# Altium PCB PCB_terminal_controller_2024-05-08.pcbdoc
Units mil, origin at the board's own origin, x right, y up, seen from the top; angles counter-clockwise.
Board outline 3205 x 4035 mil, 2 copper layers (Top Layer, Bottom Layer); 13 components, 17 nets, 138 pads, 19 vias.
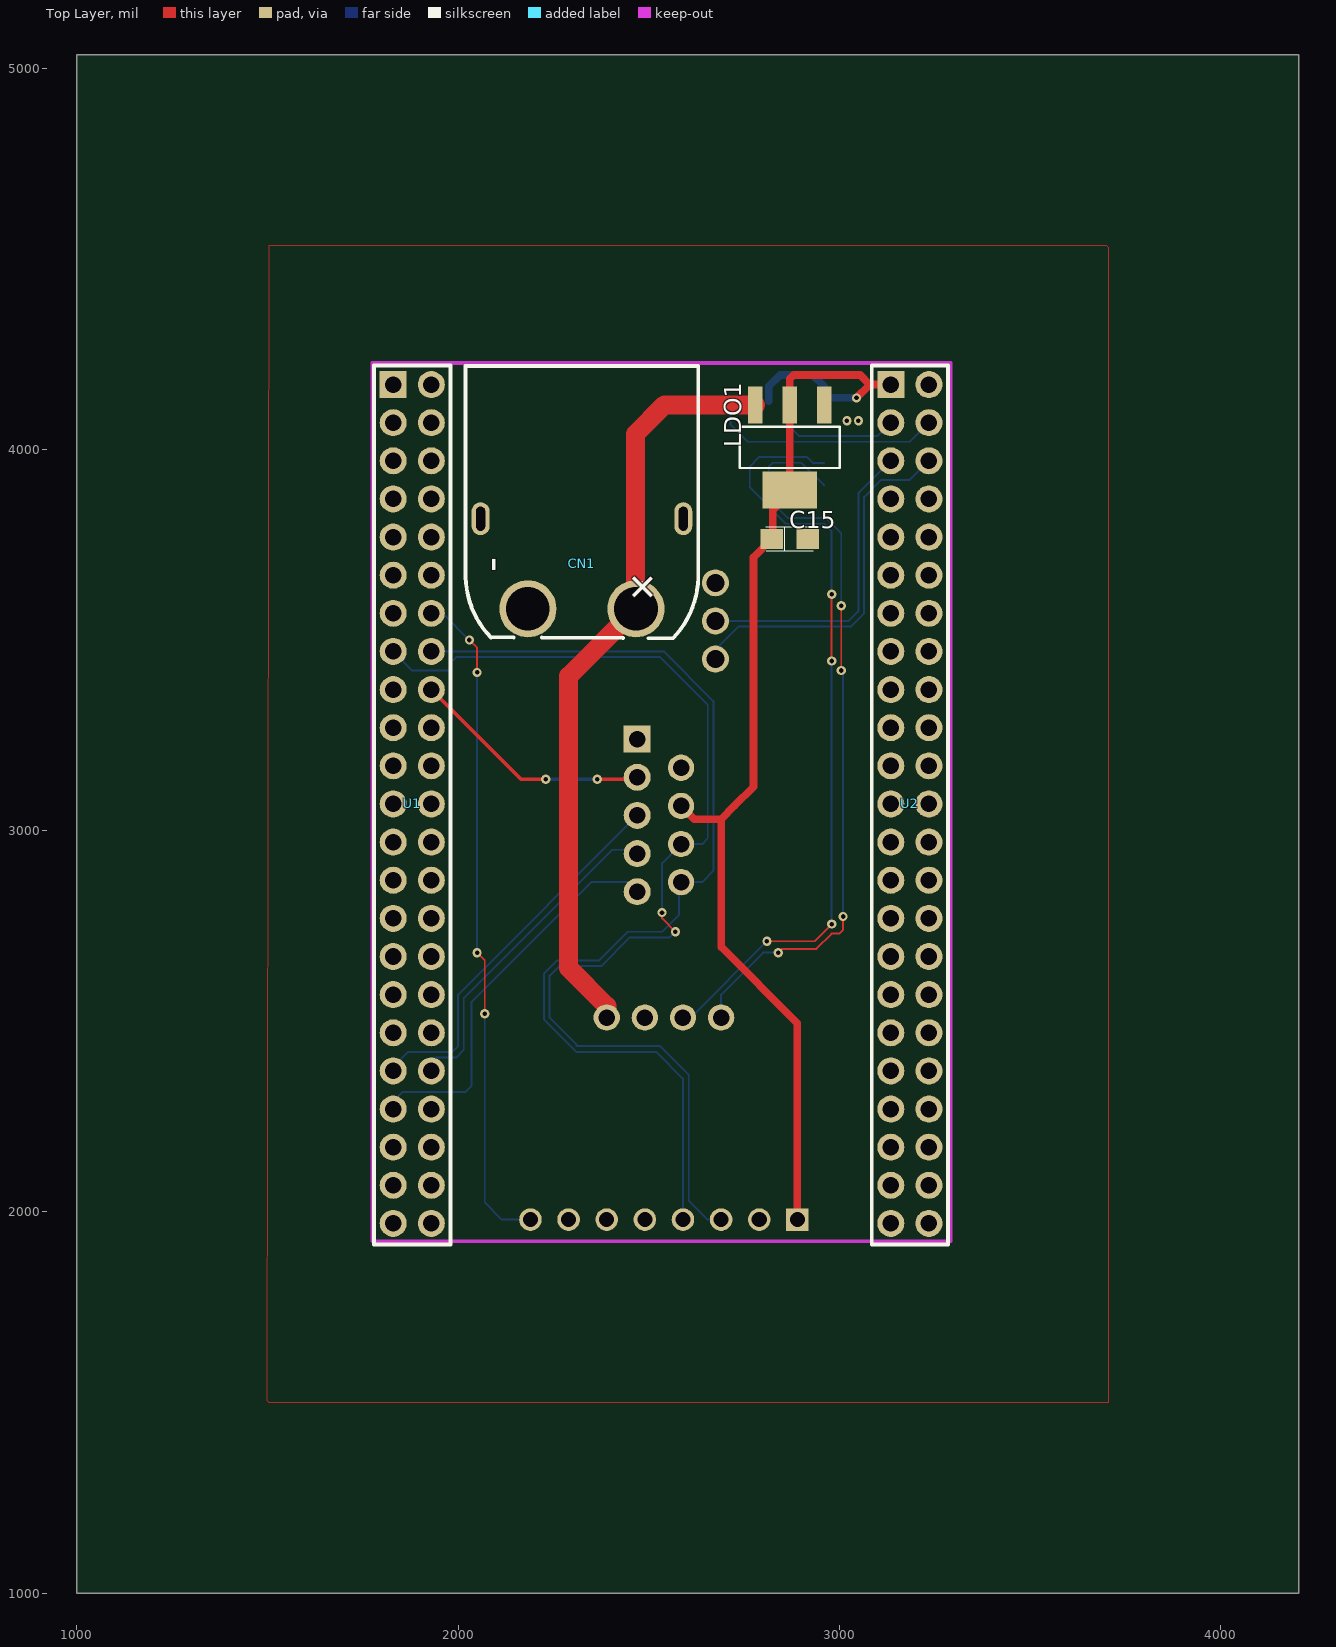
[diagram p0: Top Layer view]
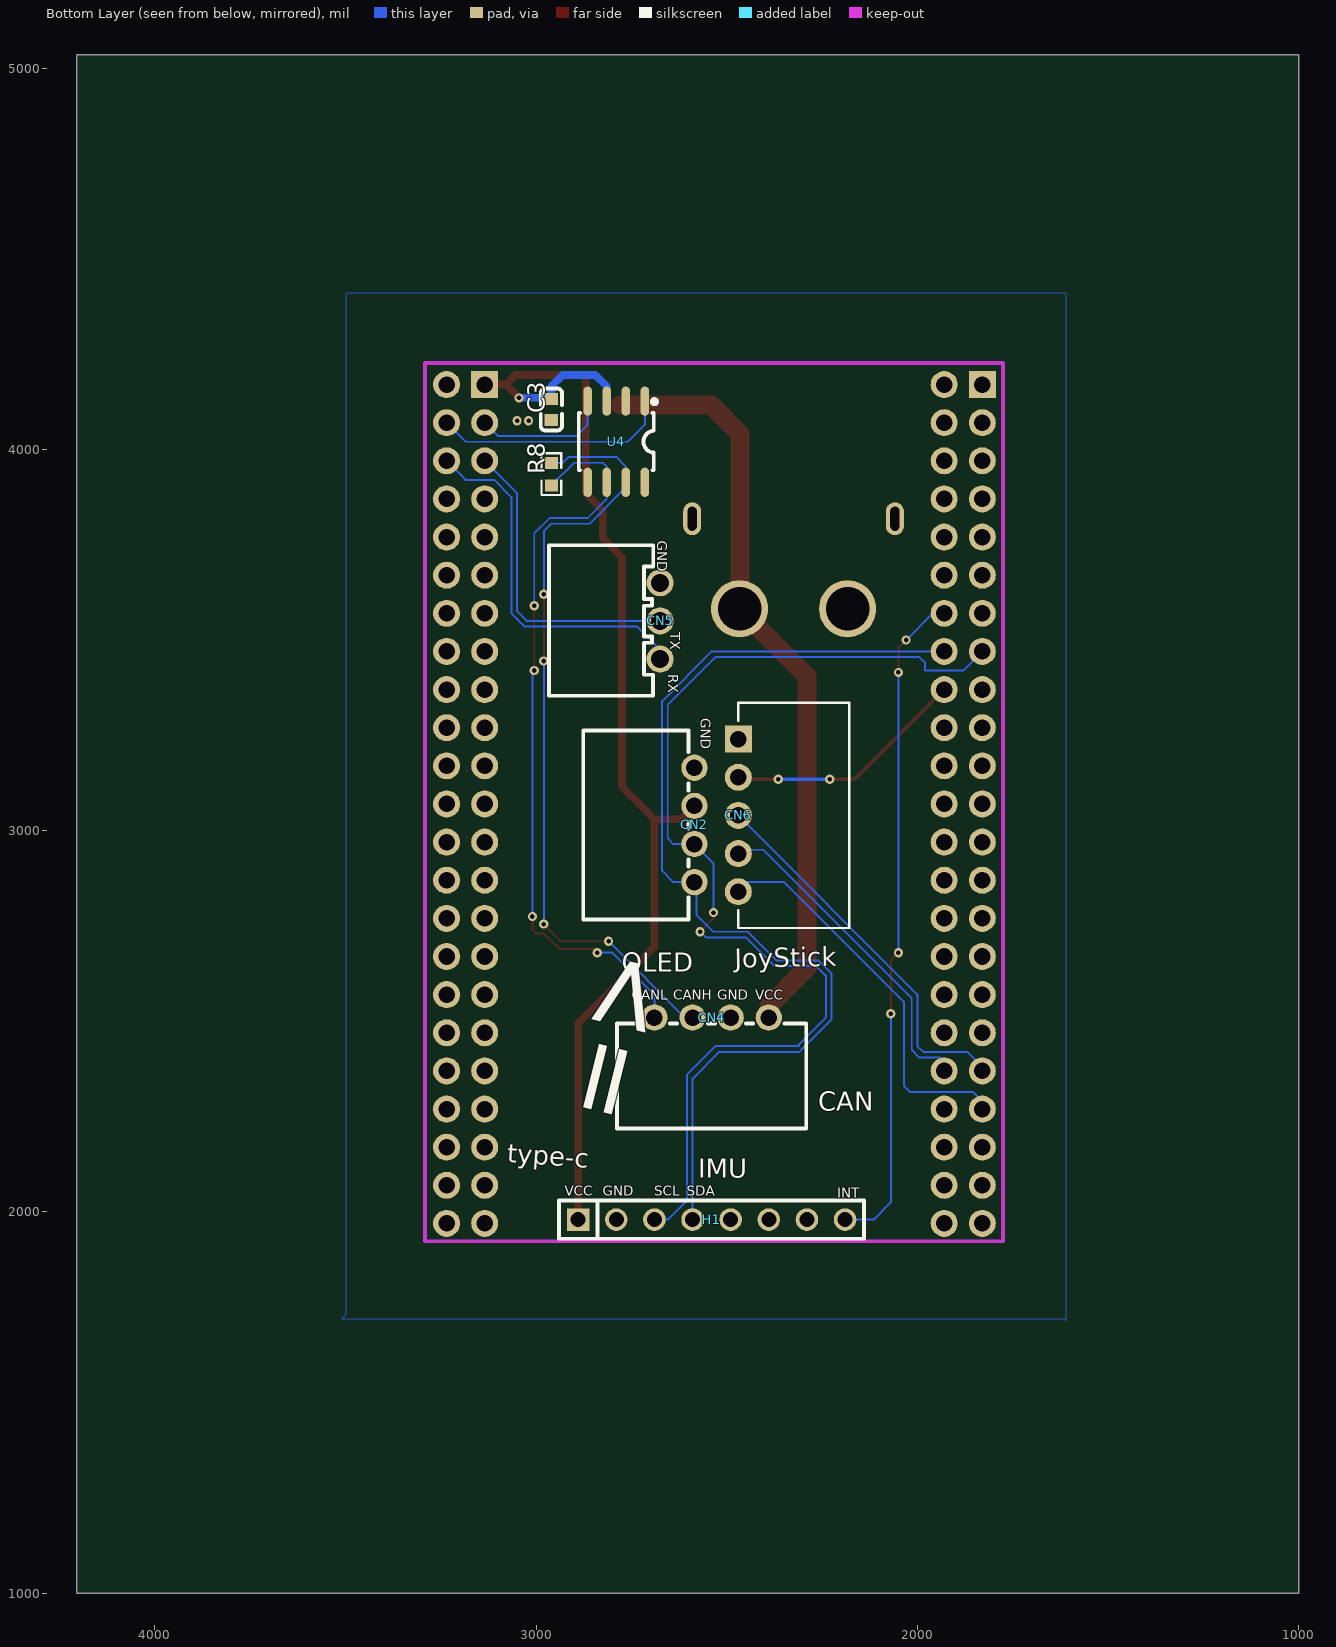
[diagram p1: Bottom Layer view, seen from below]

## Layer stack, top to bottom
Top Layer: signal copper (thickness not stored)
Dielectric: dielectric 12.6, FR-4, Dk 4.8
Bottom Layer: signal copper (thickness not stored)

## Board outline
4205,1000 1000,1000 1000,5035 4205,5035

## Components (designator, comment, footprint, x,y, rotation, side; value= is the part's Value field where it differs from the comment)
C3 "0.1uF" C0603 2960,4105 r270 bottom
C15 "10uF" CASE-A_3216 2870,3765 r0 top
CN1 "XT60PW-M" CONN-TH_XT60PW-M 2325,3700 r270 top
CN2 "2.54-4P" CONN-TH_XH-4AW 2585,3015 r90 bottom
CN4 "2.54-4P" CONN-TH_XH-4AW 2540,2510 r0 bottom
CN5 "2.54-3P" CONN-TH_3P-P2.54_HCTL_XH-3AW 2675,3550 r270 bottom
CN6 "2.54-5P" CONN-TH_5P-P2.54_XH-5AW_C2908614 2470,3040 r90 bottom
H1 "2.54-8P" HDR-TH_8P-P2.54-V-M 2540,1980 r0 bottom
LDO1 "SPX1117-5V" SOT-223-4_L6.5-W3.5-P2.30-LS7.0-BR 2870,4005 r90 top
R8 "120R" R0603 2960,3935 r270 bottom
U1 "2X23P" HDR-TH_46P-P2.54-V-M-R2-C23-S2.54 1880,3070 r270 top
U2 "2X23P" HDR-TH_46P-P2.54-V-M-R2-C23-S2.54 3185,3070 r270 top
U4 "TJA1050T" SOIC-8_L5.0-W4.0-P1.27-LS6.0-BL 2790,4020 r180 bottom

## Footprints (in the part's own frame and the unit in brackets; to place one, negate y for a bottom-side part, rotate by r counter-clockwise, add the part's x,y. Pads: shape width x height; smd on the part's side, far side on the other; paste and mask are expansions set on the pad)
C0603 [mm]
  rect 0.8x0.9 smd paste+0 mask+0.051: 1(0.7,0) 2(-0.7,0)
  silkscreen extent -1.39,-0.72 1.41,0.71
CASE-A_3216 [mm]
  rect 1.5x1.359 smd paste+0 mask+0.051: 1(-1.2,0) 2(1.2,0)
  silkscreen extent -1.6,-0.8 1.6,0.8
CONN-TH_3P-P2.54_HCTL_XH-3AW [mm]
  round 1.8 hole 1.199 paste+0 mask+0.051: 1(2.54,0) 2(-0.001,0) 3(-2.54,0)
  silkscreen extent -5.04,-7.4 4.98,-0.46
CONN-TH_5P-P2.54_XH-5AW_C2908614 [mm]
  rect 1.8x1.8 hole 1.1 paste+0 mask+0.05: 1(5.08,0)
  round 1.8 hole 1.1 paste+0 mask+0.05: 2(2.54,0) 3(0,0) 4(-2.54,0) 5(-5.08,0)
  silkscreen extent -7.5,-7.4 7.5,0
CONN-TH_XH-4AW [mm]
  round 1.75 hole 1.1 paste+0 mask+0.05: 1(3.81,0) 2(1.27,0) 3(-1.27,0) 4(-3.81,0)
  silkscreen extent -6.3,0.4 6.3,7.4
CONN-TH_XT60PW-M [mm]
  round 3.8 hole 2.9 paste+0 mask+0.05: 1(3,-3.6) 2(3,3.6)
  oval 2.2x1.2 hole 0.6 slot 1.6 at 0 deg paste+0 mask+0.05: 3(-3,6.75) 4(-3,-6.75)
  silkscreen extent -13.17,-7.75 4.96,7.75
HDR-TH_8P-P2.54-V-M [mm]
  rect 1.5x1.5 hole 1 paste+0 mask+0.051: 1(8.89,0)
  round 1.5 hole 1 paste+0 mask+0.051: 2(6.35,0) 3(3.81,0) 4(1.27,0) 5(-1.27,0) 6(-3.81,0) 7(-6.35,0) 8(-8.89,0)
  silkscreen extent -10.16,-1.27 10.16,1.27
HDR-TH_46P-P2.54-V-M-R2-C23-S2.54 [mm]
  rect 1.8x1.8 hole 1.1 paste+0 mask+0.051: 1(-27.94,-1.27)
  round 1.8 hole 1.1 paste+0 mask+0.051: 2(-27.94,1.27) 3(-25.4,-1.27) 4(-25.4,1.27) 5(-22.86,-1.27) 6(-22.86,1.27) 7(-20.32,-1.27) 8(-20.32,1.27) 9(-17.78,-1.27) 10(-17.78,1.27) 11(-15.24,-1.27) 12(-15.24,1.27) 13(-12.7,-1.27) 14(-12.7,1.27) 15(-10.16,-1.27) 16(-10.16,1.27) 17(-7.62,-1.27) 18(-7.62,1.27) 19(-5.08,-1.27) 20(-5.08,1.27) 21(-2.54,-1.27) 22(-2.54,1.27) 23(0,-1.27) 24(0,1.27) 25(2.54,-1.27) 26(2.54,1.27) 27(5.08,-1.27) 28(5.08,1.27) 29(7.62,-1.27) 30(7.62,1.27) 31(10.16,-1.27) 32(10.16,1.27) 33(12.7,-1.27) 34(12.7,1.27) 35(15.24,-1.27) 36(15.24,1.27) 37(17.78,-1.27) 38(17.78,1.27) 39(20.32,-1.27) 40(20.32,1.27) 41(22.86,-1.27) 42(22.86,1.27) 43(25.4,-1.27) 44(25.4,1.27) 45(27.94,-1.27) 46(27.94,1.27)
  silkscreen extent -29.21,-2.54 29.34,2.54
R0603 [mil]
  rect 31.75x34.02 smd paste-3937.01 mask+2: 1(29.66,0) 2(-29.66,0)
  silkscreen extent -55,-26 55,26
SOIC-8_L5.0-W4.0-P1.27-LS6.0-BL [mil]
  oval 22.38x76.78 smd paste+0 mask+2: 1(75,106.5) 2(25,106.5) 3(-25,106.5) 4(-75,106.5) 5(-75,-106.5) 6(-25,-106.5) 7(25,-106.5) 8(75,-106.5)
  silkscreen extent -98,-75 106,111
SOT-223-4_L6.5-W3.5-P2.30-LS7.0-BR [mm]
  rect 2.47x0.98 smd paste+0 mask+0.051: 1(2.835,-2.3) 2(2.835,0) 3(2.835,2.3)
  rect 2.47x3.6 smd paste+0 mask+0.051: 4(-2.835,0)
  silkscreen extent -1.37,-3.33 1.37,3.33

## Via types
v1: diameter 24, hole 12, Top Layer to Bottom Layer, tented both sides, 19 vias

## Nets (pads, with @x,y where several pads share a name; then routed paths per layer and width w, separated by ;. In a path a pad name is that pad's centre, name@x,y a point inside that pad or via, vN(x,y) a via of type N, cw(c..) or ccw(c..) an arc to the next point about the centre after c; other vN are vias at no path point)
+3.3V: CN6.2 U1.18 | length 639.4
  Top Layer w10: U1.18 2165,3135 v1(2230,3135) ; v1(2365,3135) 2465,3135 CN6.2
  Bottom Layer w10: v1(2230,3135) v1(2365,3135)
+5V: C3.2 C15.1 CN2.2 H1.1 LDO1.2 LDO1.4 U2.1 U4.3 | length 3137.7
  Top Layer w20: CN2.2 2620,3030 2690,3030 ; H1.1 2890,2495 2690,2695 2690,3030 ; v1(3045,4135) 3080,4170 ; U2.1 3080,4170 ; 2690,3030 2725,3065 2775,3115 2775,3717.24 C15.1 2825,3767.24 2825,3840 2870,3885 LDO1.4 LDO1.2 2870,4185 2880,4195 3055,4195 3080,4170
  Bottom Layer w20: U4.3 2815,4165 2845,4195 2930,4195 2960,4165 C3.2 2962.44,4135 v1(3045,4135)
CAN_RX: U2.3 U4.4 | length 358.4
  Bottom Layer w5: U4.4 2865,4065 2895,4035 3100,4035 U2.3
CAN_TX: U2.4 U4.1 | length 620.9
  Bottom Layer w5: U4.1 2715,4065 2760,4020 3185,4020 U2.4
CANH: CN4.2 R8.2 U4.7 | length 2050.8
  Top Layer w5: v1(2810,2710) 2935,2710 v1(2980,2755) ; v1(2980,3445) v1(2980,3620)
  Bottom Layer w5: CN4.2 2610,2510 v1(2810,2710) ; R8.2 2930.34,3964.66 2915,3980 2790,3980 2765,3955 U4.7 2765,3900 2860,3805 2960,3805 2980,3785 v1(2980,3620) ; v1(2980,2755) v1(2980,3445)
CANL: CN4.1 R8.1 U4.6 | length 1993.6
  Top Layer w5: v1(2840,2680) 2850,2690 2940,2690 2980,2730 3000,2730 3010,2740 v1(3010,2775) ; v1(3005,3420) v1(3005,3590)
  Bottom Layer w5: CN4.1@2690,2525 CN4.1 2690,2570 2800,2680 v1(2840,2680) ; R8.1 2900,3965 2825,3965 2815,3955 U4.6 2815,3870 2865,3820 2965,3820 3005,3780 v1(3005,3590) ; v1(3005,3420) 3010,3415 v1(3010,2775)
GND: C3.1 C15.2 CN1.1 CN2.1 CN4.3 CN5.3 CN6.1 H1.2 H1.7 LDO1.1 U1.24 U2.45 U4.2 U4.8
  other v1: 3020,4075 3050,4075
INT: H1.8 U1.14 | length 1759.2
  Top Layer w5: v1(2030,3500) 2050,3480 v1(2050,3415) ; v1(2050,2680) 2070,2660 v1(2070,2520)
  Bottom Layer w5: U1.14 1960,3570 v1(2030,3500) ; v1(2050,2680) v1(2050,3415) ; v1(2070,2520) 2070,2025 2115,1980 H1.8
S$1126: 
SCL: CN2.3 H1.3 U1.15 | length 2968.1
  Top Layer w5: v1(2535,2785) 2535,2770 v1(2570,2735)
  Bottom Layer w5: U1.15 1880,3420 1980,3420 1980,3440 1995,3455 2530,3455 2655,3330 2655,2980 2640,2965 CN2.3 2535,2915 v1(2535,2785) ; v1(2570,2735) 2555,2720 2450,2720 2375,2645 2265,2645 2240,2620 2240,2510 2310.7,2439.3 2310.7,2435 2530,2435 2605,2360 2605,2030 2655,1980 H1.3
SDA: CN2.4 H1.4 U1.16 | length 2761.8
  Bottom Layer w5: U1.16 2540,3470 2670,3340 2670,2895 2640,2865 CN2.4 2580,2860 2580,2780 2535,2735 2445,2735 2370,2660 2260,2660 2225,2625 2225,2505 2310,2420 2520,2420 2590,2350 H1.4
SW: CN6.5 U1.39 | length 1037.4
  Bottom Layer w5: U1.39 1830,2290 1855,2315 2020,2315 2035,2330 2035,2550 2350,2865 2445,2865 CN6.5
USART_RX: CN5.1 U2.6 | length 968.7
  Bottom Layer w5: CN5.1 2675,3475 2735,3535 3030,3535 3065,3570 3065,3875 3110,3920 3185,3920 U2.6
USART_TX: CN5.2 U2.5 | length 815.6
  Bottom Layer w5: CN5.2 3025,3550 3050,3575 3050,3885 U2.5
VCC: CN1.2 CN4.4 LDO1.3 | length 1991.5
  Top Layer w50: CN4.4 2390,2540 2290,2640 2290,3405.2 CN1.2 ; CN1.2 2465,3583.62 2465,4040 2541.61,4116.61 LDO1.3
VRX: CN6.3 U1.37 | length 1002.5
  Bottom Layer w5: U1.37 1830,2380 1870,2420 1985,2420 2000,2435 2000,2570 CN6.3
VRY: CN6.4 U1.38 | length 878.1
  Bottom Layer w5: U1.38 1930,2395 1940,2405 1995,2405 2015,2425 2015,2560 2405,2950 2460,2950 CN6.4
pads on no net: CN1.3 CN1.4 H1.5 H1.6 U1.1 U1.2 U1.3 U1.4 U1.5 U1.6 U1.7 U1.8 U1.9 U1.10 U1.11 U1.12 U1.13 U1.17 U1.19 U1.20 U1.21 U1.22 U1.23 U1.25 U1.26 U1.27 U1.28 U1.29 U1.30 U1.31 U1.32 U1.33 U1.34 U1.35 U1.36 U1.40 U1.41 U1.42 U1.43 U1.44 U1.45 U1.46 U2.2 U2.7 U2.8 U2.9 U2.10 U2.11 U2.12 U2.13 U2.14 U2.15 U2.16 U2.17 U2.18 U2.19 U2.20 U2.21 U2.22 U2.23 U2.24 U2.25 U2.26 U2.27 U2.28 U2.29 U2.30 U2.31 U2.32 U2.33 U2.34 U2.35 U2.36 U2.37 U2.38 U2.39 U2.40 U2.41 U2.42 U2.43 U2.44 U2.46 U4.5

## Polygon pours and split planes (outlines as drawn)
GND on Top Layer (solid): 1505,4535 3700,4535 3705,4530 3705,1500 1505,1500 1500,1505
GND on Bottom Layer (solid): 1610,4410 3495,4410 3500,4405 3500,1730 3510,1720 1615,1720 1610,1715

## Silkscreen, mask and mechanical layers (free items; w line width, h text height)
Bottom Overlay:
  text "GND" at 2683,3760.05 h26 r90
  text "TX" at 2648,3520 h26 r90
  text "RX" at 2653,3410 h26 r90
  text "JoyStick" at 2479.56,2640 h50 r359
  text "OLED" at 2775,2630 h50
  text "VCC" at 2425,2557 h26
  text "GND" at 2525,2557 h26
  text "CANH" at 2640,2557 h26
  text "CANL" at 2750,2557 h26
  text "CAN" at 2260,2265 h50
  text "=>" at 2762.97,2215.81 h200 r284
  text "type-c" at 3076.83,2129.97 h50 r4
  text "IMU" at 2575,2090 h50
  text "SDA" at 2605,2042 h26
  text "SCL" at 2690,2042 h26
  text "GND" at 2825,2042 h26
  text "VCC" at 2925,2042 h26
  text "INT" at 2210,2037 h26

## Text inside footprints (layer, text, board x,y; h text height)
CN1: Top Overlay "-" at 2125,3678.11 h80 r90; Top Overlay "+" at 2491.72,3696.39 h80 r225
CN6: Bottom Overlay "GND" at 2568,3295 h26 r90